# EAGLE board PCB control glider v30 (EAGLE 9.7.0)
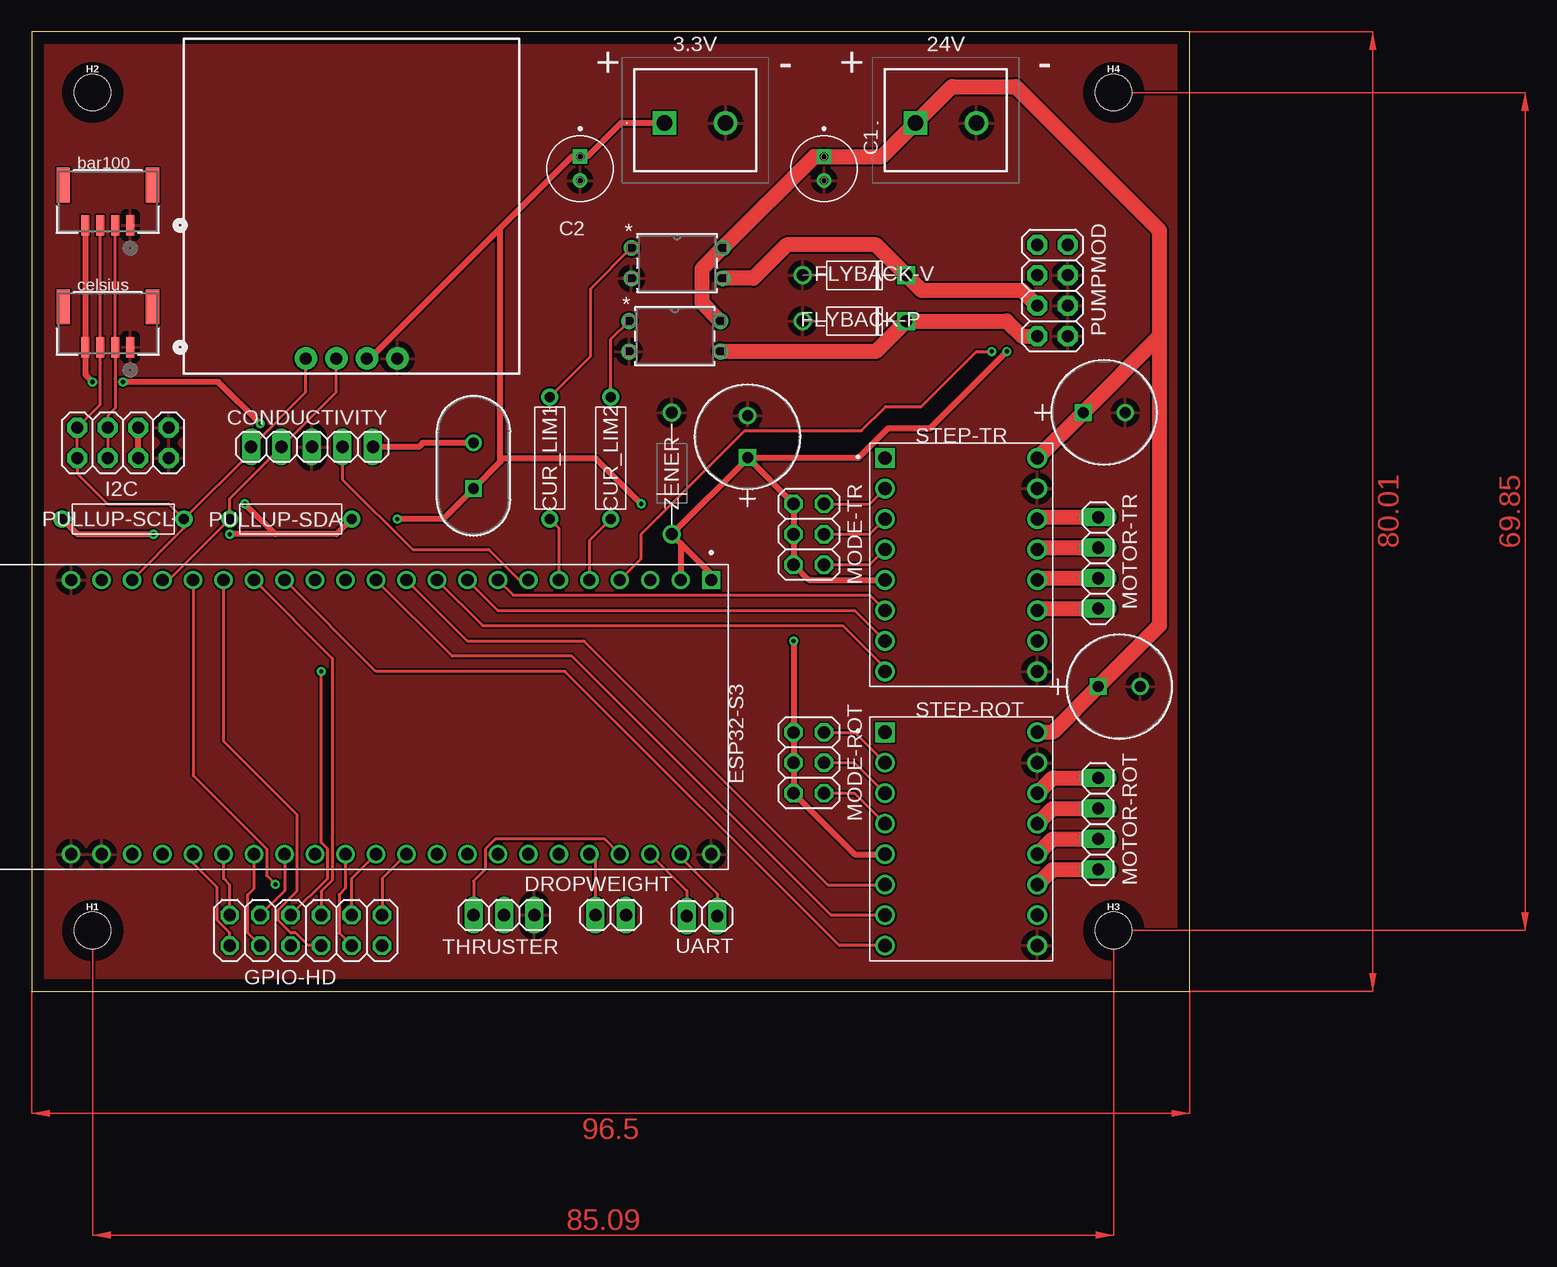
[diagram p0: board, top side]
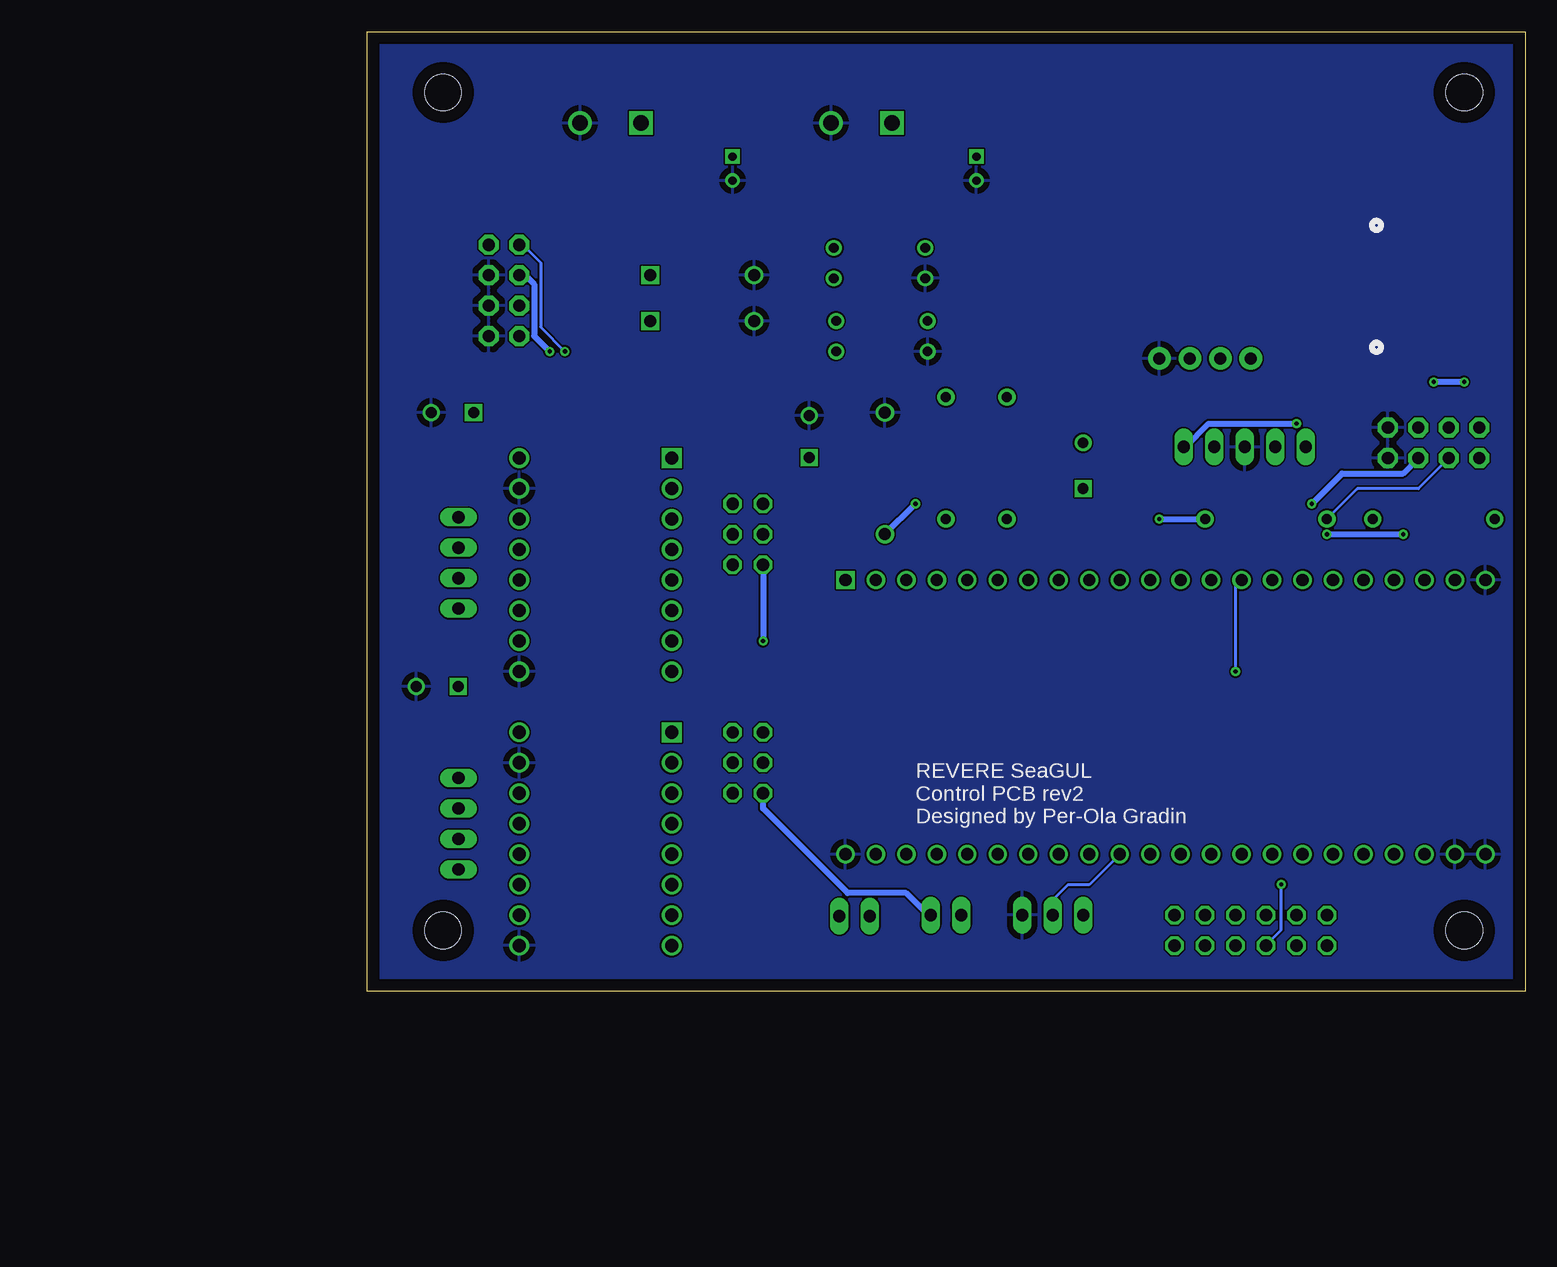
[diagram p1: board, bottom side, seen from below]

Size 96.5 x 80.01 mm. Coordinates in mm from the lower left corner, seen from the top.
Outline: 0,0 96.5,0 96.5,80.01 0,80.01 0,0
Copper layers (1*16): Top 0.035mm / dielectric 1.5mm / Bottom 0.035mm
Design rules "default *": minimum track width 6mil, minimum drill 0.35mm, track to track 6mil, track to pad 6mil, pad to pad 6mil, via to via 6mil, smd to smd 6mil, copper to edge 40mil, drill to drill 6mil, minimum pad ring 10mil, minimum via ring 8mil, stop-mask expansion 4mil, vias tented up to drill 0mil, thermal gap 0.5mm

## Footprints (pad centres in the part's own frame; a part is rotated, then mirrored left to right if it is on the bottom)
CTBP05082 = drill 1.3 pad 1.95 square: 1 0,0 | drill 1.3 pad 1.95: 2 5.08,0
CAP_RADIAL_2MM = drill 0.7 pad 1.1 square: 1 -1,0 | drill 0.7 pad 1.1: 2 1,0
CAP_PAN_8X11.5_PAN = drill 0.914 pad 1.422 square: 1 0,0 | drill 0.914 pad 1.422: 2 3.505,0
CONN_BM04B-GHS-TBT_JST = smd 0.66 x 1.702: 1 -1.875,1.976; 2 -0.625,1.976; 3 0.625,1.976; 4 1.875,1.976 | smd 1.092 x 2.896: 5 -3.725,-1.373; 6 3.725,-1.373
1X05 = drill 1.016 long: 1 -5.08,0; 2 -2.54,0; 3 0,0; 4 2.54,0; 5 5.08,0
RESAD1016W63L850D250B = drill 0.83 pad 1.43: 1 -5.08,0; 2 5.08,0
1X02 = drill 1.016 long: 1 -1.27,0; 2 1.27,0
XCVR_ESP32-S3-DEVKITC-1U-N8R2 = drill 1.02 square: J1_1 -11.43,29.97 | drill 1.02: J1_2 -11.43,27.43; J1_3 -11.43,24.89; J1_4 -11.43,22.35; J1_5 -11.43,19.81; J1_6 -11.43,17.27; J1_7 -11.43,14.73; J1_8 -11.43,12.19; J1_9 -11.43,9.65; J1_10 -11.43,7.11; J1_11 -11.43,4.57; J1_12 -11.43,2.03; J1_13 -11.43,-0.51; J1_14 -11.43,-3.05; J1_15 -11.43,-5.59; J1_16 -11.43,-8.13; J1_17 -11.43,-10.67; J1_18 -11.43,-13.21; J1_19 -11.43,-15.75; J1_20 -11.43,-18.29; J1_21 -11.43,-20.83; J1_22 -11.43,-23.37; J3_1 11.43,29.97; J3_2 11.43,27.43; J3_3 11.43,24.89; J3_4 11.43,22.35; J3_5 11.43,19.81; J3_6 11.43,17.27; J3_7 11.43,14.73; J3_8 11.43,12.19; J3_9 11.43,9.65; J3_10 11.43,7.11; J3_11 11.43,4.57; J3_12 11.43,2.03; J3_13 11.43,-0.51; J3_14 11.43,-3.05; J3_15 11.43,-5.59; J3_16 11.43,-8.13; J3_17 11.43,-10.67; J3_18 11.43,-13.21; J3_19 11.43,-15.75; J3_20 11.43,-18.29; J3_21 11.43,-20.83; J3_22 11.43,-23.37
DO-41 = drill 1: A 4.325,0 | drill 1 square: C -4.325,0
FUS_LVR033_TYCO_TYC = drill 0.889 pad 1.397 square: 1 0,0 | drill 0.889 pad 1.397: 2 3.81,0
2X06 = drill 1.016 octagon: 1 -6.35,-1.27; 2 -6.35,1.27; 3 -3.81,-1.27; 4 -3.81,1.27; 5 -1.27,-1.27; 6 -1.27,1.27; 7 1.27,-1.27; 8 1.27,1.27; 9 3.81,-1.27; 10 3.81,1.27; 11 6.35,-1.27; 12 6.35,1.27
STAND-OFF-TIGHT = hole 3.048: 0,0
2X04 = drill 1.016 pad 1.676 octagon: 1 -3.81,-1.27; 2 -3.81,1.27; 3 -1.27,-1.27; 4 -1.27,1.27; 5 1.27,-1.27; 6 1.27,1.27; 7 3.81,-1.27; 8 3.81,1.27
2X03 = drill 1.016 octagon: 1 -2.54,-1.27; 2 -2.54,1.27; 3 0,-1.27; 4 0,1.27; 5 2.54,-1.27; 6 2.54,1.27
1X04 = drill 1.016 long: 1 -3.81,0; 2 -1.27,0; 3 1.27,0; 4 3.81,0
OPENLOG = drill 1.016 pad 1.88: GND 17.78,1.27; RXI 10.16,1.27; TXO 12.7,1.27; VCC 15.24,1.27
A-DIP4_THD_OMR = drill 0.813 pad 1.321: 1 0,0; 2 0,-2.54; 3 7.62,-2.54; 4 7.62,0
IC_DRV8825_STEPPER_MOTOR_DRIVER_CARRIER = drill 1.1 square: 1 -6.35,8.89 | drill 1.1: 2 -6.35,6.35; 3 -6.35,3.81; 4 -6.35,1.27; 5 -6.35,-1.27; 6 -6.35,-3.81; 7 -6.35,-6.35; 8 -6.35,-8.89; 9 6.35,-8.89; 10 6.35,-6.35; 11 6.35,-3.81; 12 6.35,-1.27; 13 6.35,1.27; 14 6.35,3.81; 15 6.35,6.35; 16 6.35,8.89
1X03 = drill 1.016 long: 1 -2.54,0; 2 0,0; 3 2.54,0
DIODE-AXIAL = drill 1: 1 -5.08,0; 2 5.08,0

## Placement (x,y rotation side)
3.3V  CTBP0508_2  [CTBP05082]  52.75,72.39 0 top
24V  CTBP0508_2  [CTBP05082]  73.66,72.39 0 top
C1  ECA-1HM100  [CAP_RADIAL_2MM]  66.04,68.58 270 top
C2  ECA-1HM100  [CAP_RADIAL_2MM]  45.72,68.58 270 top
CAP-ESP  EEUHD1H101BCAP_PAN_8X11.5_PAN  [CAP_PAN_8X11.5_PAN]  59.66,44.48 90 top
CAP-ROT  EEUHD1H101BCAP_PAN_8X11.5_PAN  [CAP_PAN_8X11.5_PAN]  88.9,25.4 0 top
CAP-TR  EEUHD1H101BCAP_PAN_8X11.5_PAN  [CAP_PAN_8X11.5_PAN]  87.63,48.26 0 top
CELSIUS  BM04B-GHS-TBTCONN_BM04B-GHS-TBT_JST  [CONN_BM04B-GHS-TBT_JST]  6.35,55.67 180 top
CONDUCTIVITY  PINHD-1X5  [1X05]  23.37,45.39 0 top
CUR_LIM1  [RESAD1016W63L850D250B]  43.18,44.45 270 top
CUR_LIM2  [RESAD1016W63L850D250B]  48.26,44.45 270 top
DROPWEIGHT  [1X02]  48.26,6.35 180 top
ESP32-S3  ESP32-S3-DEVKITC-1U-N8R2  [XCVR_ESP32-S3-DEVKITC-1U-N8R2]  26.67,22.86 270 top
FLYBACK-P  1N4004  [DO-41]  68.58,55.88 180 top
FLYBACK-V  1N4004  [DO-41]  68.58,59.69 180 top
FUSE-SENS  LVR033KFUS_LVR033_TYCO_TYC  [FUS_LVR033_TYCO_TYC]  36.83,41.91 90 top
GPIO-HD  PINHD-2X6  [2X06]  22.86,5.08 0 top
H1  STAND-OFFTIGHT  [STAND-OFF-TIGHT]  5.08,5.08 0 top
H2  STAND-OFFTIGHT  [STAND-OFF-TIGHT]  5.08,74.93 0 top
H3  STAND-OFFTIGHT  [STAND-OFF-TIGHT]  90.17,5.08 0 top
H4  STAND-OFFTIGHT  [STAND-OFF-TIGHT]  90.17,74.93 0 top
I2C  [2X04]  7.62,45.72 180 top
MODE-ROT  PINHD-2X3  [2X03]  64.77,19.05 270 top
MODE-TR  PINHD-2X3  [2X03]  64.77,38.1 270 top
MOTOR-ROT  PINHD-1X4  [1X04]  88.88,13.97 90 top
MOTOR-TR  PINHD-1X4  [1X04]  88.88,35.71 90 top
PRESSURE  BM04B-GHS-TBTCONN_BM04B-GHS-TBT_JST  [CONN_BM04B-GHS-TBT_JST]  6.35,65.83 180 top
PULLUP-SCL  [RESAD1016W63L850D250B]  7.62,39.37 180 top
PULLUP-SDA  [RESAD1016W63L850D250B]  21.59,39.37 0 top
PUMPMOD  [2X04]  85.09,58.42 90 top
QWIIC-OPENLOG  OPENLOG  [OPENLOG]  12.7,51.49 0 top
SSR-PUMP  G3VM-61ARA-DIP4_THD_OMR  [A-DIP4_THD_OMR]  49.79,55.88 0 top
SSR-VALVE  G3VM-61ARA-DIP4_THD_OMR  [A-DIP4_THD_OMR]  49.99,61.97 0 top
STEP-ROT  DRV8825_STEPPER_MOTOR_DRIVER_CARRIER  [IC_DRV8825_STEPPER_MOTOR_DRIVER_CARRIER]  77.47,12.7 0 top
STEP-TR  DRV8825_STEPPER_MOTOR_DRIVER_CARRIER  [IC_DRV8825_STEPPER_MOTOR_DRIVER_CARRIER]  77.47,35.56 0 top
THRUSTER  [1X03]  39.37,6.35 0 top
UART  [1X02]  55.88,6.27 180 top
ZENER  ZENER_DIODE-AXIAL  [DIODE-AXIAL]  53.34,43.18 270 top

## Library data of the parts
3.3V 24V = CTBP0508_2; DESCRIPTION: Conn Terminal Block F 2 POS 5.08mm Solder ST Thru-Hole 8A; HEIGHT: 10.2mm; MANUFACTURER_NAME: CAMDENBOSS; MANUFACTURER_PART_NUMBER: CTBP0508/2
C1 C2 = Resistor_Capacitor; CREATED_BY: PCBLayout.com; DIGIKEY_PART_NUMBER: P5178-ND; MANUFACTURER: Panasonic Electronic Components; MPN: ECA-1HM100; PACKAGE: CAP RADIAL 2MM LS
CAP-ESP CAP-ROT CAP-TR = 100uf-50V-electrolytic_Library; COPYRIGHT: Copyright (C) 2024 Ultra Librarian. All rights reserved.; MANUFACTURER_PART_NUMBER: EEUHD1H101B; MFR_NAME: Panasonic
CELSIUS PRESSURE = BM04B_GHS_TBT_Library; COPYRIGHT: Copyright (C) 2024 Ultra Librarian. All rights reserved.; MANUFACTURER_PART_NUMBER: BM04B-GHS-TBT; MFR_NAME: JST
CONDUCTIVITY = Connector; CATEGORY: Headers; DESCRIPTION: Header, Straight, 5 Position; MANUFACTURER: Generic; MPN: Generic; OPERATING_TEMPERATURE: Generic; PART_STATUS: Active; PITCH: 0.100" (2.54mm); ROHS_COMPLIANCE: Generic; SERIES: Generic; SUB-CATEGORY: Headers, Male Pins; TYPE: Board to Board or Cable, Unshrouded, Through Hole, Straight
CUR_LIM1 CUR_LIM2 PULLUP-SCL PULLUP-SDA ZENER = Tinkercad
DROPWEIGHT UART = Airquality_Sensor
ESP32-S3 = ESP32-S3-DEVKITC-1U-N8R2; AVAILABILITY: In Stock; CHECK_PRICES: https://www.snapeda.com/parts/ESP32-S3-DEVKITC-1U-N8R2/Espressif+Systems/view-part/?ref=eda; DESCRIPTION: WiFi Development Tools - 802.11 ESP32-S3 Gen-Purpose Dev Bd, embeds ESP32-S3-WROOM-1U-N8R2, 8 MB Quad Flash, 2 MB Quad PSRAM, IPEX antenna connector, w/ Pin Header; MF: Espressif Systems; MP: ESP32-S3-DEVKITC-1U-N8R2; PACKAGE: None; PRICE: None; PURCHASE-URL: https://www.snapeda.com/api/url_track_click_mouser/?unipart_id=12089198&manufacturer=Espressif Systems&part_name=ESP32-S3-DEVKITC-1U-N8R2&search_term=esp32-s3-devkitc; SNAPEDA_LINK: https://www.snapeda.com/parts/ESP32-S3-DEVKITC-1U-N8R2/Espressif+Systems/view-part/?ref=snap
FLYBACK-P FLYBACK-V = Diodes; CREATED_BY: PCBLayout.com; DIGIKEY_PART_NUMBER: 1N4004MSCT-ND; MANUFACTURER: Micro Commercial Co; MPN: 1N4004; PACKAGE: DO-41
FUSE-SENS = LVR033K-fuse_Library; COPYRIGHT: Copyright (C) 2024 Ultra Librarian. All rights reserved.; MANUFACTURER_PART_NUMBER: LVR033K; MFR_NAME: TE Connectivity
GPIO-HD = Connector; CATEGORY: Headers; DESCRIPTION: Header, Straight, 2x6 Position; MANUFACTURER: Generic; MPN: Generic; OPERATING_TEMPERATURE: Generic; PART_STATUS: Active; PITCH: 0.100" (2.54mm); ROHS_COMPLIANCE: Generic; SERIES: Generic; SUB-CATEGORY: Headers, Male Pins; TYPE: Board to Board or Cable, Unshrouded, Through Hole, Straight
H1-H4 = SparkFun-Hardware
I2C PUMPMOD = adafruit
MODE-ROT MODE-TR = Connector; CATEGORY: Headers; DESCRIPTION: Header, Straight, 2x3 Position; MANUFACTURER: Generic; MPN: Generic; OPERATING_TEMPERATURE: Generic; PART_STATUS: Active; PITCH: 0.100" (2.54mm); ROHS_COMPLIANCE: Generic; SERIES: Generic; SUB-CATEGORY: Headers, Male Pins; TYPE: Board to Board or Cable, Unshrouded, Through Hole, Straight
MOTOR-ROT MOTOR-TR = Connector; CATEGORY: Headers; DESCRIPTION: Header, Straight, 4 Position; MANUFACTURER: Generic; MPN: Generic; OPERATING_TEMPERATURE: Generic; PART_STATUS: Active; PITCH: 0.100" (2.54mm); ROHS_COMPLIANCE: Generic; SERIES: Generic; SUB-CATEGORY: Headers, Male Pins; TYPE: Board to Board or Cable, Unshrouded, Through Hole, Straight
QWIIC-OPENLOG = OpenLog qwiic
SSR-PUMP SSR-VALVE = g3vm-61ar; COPYRIGHT: Copyright (C) 2024 Ultra Librarian. All rights reserved.; MANUFACTURER_PART_NUMBER: G3VM-61AR; MFR_NAME: Omron
STEP-ROT STEP-TR = DRV8825_STEPPER_MOTOR_DRIVER_CARRIER; AVAILABILITY: Not in stock; CHECK_PRICES: https://www.snapeda.com/parts/DRV8825%20STEPPER%20MOTOR%20DRIVER%20CARRIER/Pololu/view-part/?ref=eda; DESCRIPTION: Stepper, Bipolar 8.2 ~ 45VDC Supply 1.5A 8.2 ~ 45V Load; MF: Pololu; MP: DRV8825 STEPPER MOTOR DRIVER CARRIER; PACKAGE: None; PRICE: None; SNAPEDA_LINK: https://www.snapeda.com/parts/DRV8825%20STEPPER%20MOTOR%20DRIVER%20CARRIER/Pololu/view-part/?ref=snap
THRUSTER = pinhead

## Nets
3.3V: 3.3V.1 C2.1 CAP-ESP.1 DROPWEIGHT.1 ESP32-S3.J1_1 ESP32-S3.J1_2 FUSE-SENS.1 I2C.3 I2C.4 MODE-ROT.1 MODE-ROT.3 MODE-ROT.5 MODE-TR.1 MODE-TR.3 MODE-TR.5 PULLUP-SCL.2 PULLUP-SDA.2 PUMPMOD.6 QWIIC-OPENLOG.VCC STEP-ROT.5 STEP-TR.5 ZENER.2
5V0: ESP32-S3.J1_21
+24V: 24V.1 C1.1 CAP-ROT.1 CAP-TR.1 SSR-PUMP.4 SSR-VALVE.4 STEP-ROT.16 STEP-TR.16
ATLAS-ONOFF: CONDUCTIVITY.4 ESP32-S3.J1_7
DROPWEIGHT-SIGNAL: DROPWEIGHT.2 ESP32-S3.J3_5
ESC-SIGNAL: ESP32-S3.J3_4 THRUSTER.1
GND [New Class]: 3.3V.2 24V.2 C1.2 C2.2 CAP-ESP.2 CAP-ROT.2 CAP-TR.2 CELSIUS.1 CONDUCTIVITY.3 ESP32-S3.J1_22 ESP32-S3.J3_1 ESP32-S3.J3_21 ESP32-S3.J3_22 FLYBACK-P.A FLYBACK-V.A I2C.1 I2C.2 PRESSURE.1 PUMPMOD.1 PUMPMOD.3 PUMPMOD.5 QWIIC-OPENLOG.GND SSR-PUMP.2 SSR-VALVE.2 STEP-ROT.9 STEP-ROT.15 STEP-TR.9 STEP-TR.15 THRUSTER.3 ZENER.1
GPIO10: ESP32-S3.J1_16 GPIO-HD.8
GPIO11: ESP32-S3.J1_17 GPIO-HD.7
GPIO12: ESP32-S3.J1_18 GPIO-HD.5
GPIO21: ESP32-S3.J3_18 GPIO-HD.1
GPIO35: ESP32-S3.J3_13 GPIO-HD.9
GPIO36: ESP32-S3.J3_12 GPIO-HD.10
GPIO37: ESP32-S3.J3_11 GPIO-HD.12
GPIO45: ESP32-S3.J3_15 GPIO-HD.4
GPIO46: ESP32-S3.J1_14 GPIO-HD.6
GPIO47: ESP32-S3.J3_17 GPIO-HD.2
GPIO48: ESP32-S3.J3_16 GPIO-HD.3
N$1: ESP32-S3.J3_2 UART.1
N$3: ESP32-S3.J3_3 UART.2
N$4: MODE-TR.2 STEP-TR.2
N$5: MODE-TR.4 STEP-TR.3
N$6: MODE-TR.6 STEP-TR.4
N$7: CELSIUS.4 CONDUCTIVITY.5 FUSE-SENS.2 PRESSURE.4
N$8: MODE-ROT.2 STEP-ROT.2
N$10: MODE-ROT.6 STEP-ROT.4
N$12: MODE-ROT.4 STEP-ROT.3
N$13: CUR_LIM2.1 SSR-PUMP.1
N$14: CUR_LIM1.1 SSR-VALVE.1
POTENTIOMETER-SIG: ESP32-S3.J1_4 PUMPMOD.8
PUMP-VIN: FLYBACK-P.C PUMPMOD.2 SSR-PUMP.3
R-A1: MOTOR-ROT.2 STEP-ROT.12
R-A2: MOTOR-ROT.1 STEP-ROT.11
R-B1: MOTOR-ROT.3 STEP-ROT.13
R-B2: MOTOR-ROT.4 STEP-ROT.14
ROT-DIR: ESP32-S3.J1_15 STEP-ROT.8
ROT-STEP: ESP32-S3.J1_12 STEP-ROT.7
RST: ESP32-S3.J1_3
SCL: CELSIUS.3 CONDUCTIVITY.1 ESP32-S3.J1_20 I2C.7 I2C.8 PRESSURE.3 PULLUP-SCL.1 QWIIC-OPENLOG.RXI
SDA: CELSIUS.2 CONDUCTIVITY.2 ESP32-S3.J1_19 I2C.5 I2C.6 PRESSURE.2 PULLUP-SDA.1 QWIIC-OPENLOG.TXO
SSR-PUMP-SIG: CUR_LIM2.2 ESP32-S3.J1_5
SSR-THRUSTER: ESP32-S3.J3_10 THRUSTER.2
SSR-VALVE-SIG: CUR_LIM1.2 ESP32-S3.J1_6
STEP-ROT-SLP: ESP32-S3.J1_11 STEP-ROT.6
STEP-TR-SLP: ESP32-S3.J1_8 STEP-TR.6
T-A1: MOTOR-TR.2 STEP-TR.12
T-A2: MOTOR-TR.1 STEP-TR.11
T-B1: MOTOR-TR.3 STEP-TR.13
T-B2: MOTOR-TR.4 STEP-TR.14
TR-DIR: ESP32-S3.J1_10 STEP-TR.8
TR-STEP: ESP32-S3.J1_9 STEP-TR.7
VALVE-VIN: FLYBACK-V.C PUMPMOD.4 SSR-VALVE.3

## Tracks (layer width: path | path; a pad name or v marks a point on that pad's centre or on a via)
3.3V  (via drill 0.35)
  Top 0.508: 39.08,63.63 28.2,52.76 QWIIC-OPENLOG.VCC | 39.08,44.45 39.08,44.16 FUSE-SENS.1 34.29,39.37 v30.48,39.37 | 39.08,44.45 39.08,63.63 | 39.08,44.45 46.99,44.45 v50.8,40.64 | CAP-ESP.1 59.66,44.42 ZENER.2 54.1,37.34 | 54.1,37.34 ESP32-S3.J1_2 | CAP-ESP.1 68.92,44.48 71.4,46.95 74.89,46.95 v81.28,53.34 | PULLUP-SDA.2 25.4,38.1 20.32,38.1 | 20.32,38.1 v16.51,38.1 | v10.16,38.1 3.81,38.1 PULLUP-SCL.2 | 20.32,38.1 v17.78,40.64 | I2C.4 I2C.3 | CAP-ESP.1 MODE-TR.1 MODE-TR.3 MODE-TR.5 64.77,34.29 STEP-TR.5 | v63.5,29.21 MODE-ROT.1 MODE-ROT.3 MODE-ROT.5 68.58,11.43 STEP-ROT.5 | 39.08,63.63 45.02,69.58 C2.1 46.29,69.58 49.1,72.39 3.3V.1 | 54.1,37.34 56.64,34.8 ESP32-S3.J1_1
  Bottom 0.508: v50.8,40.64 ZENER.2 | v30.48,39.37 PULLUP-SDA.2 | v16.51,38.1 v10.16,38.1 | v17.78,40.64 15.24,43.18 10.16,43.18 I2C.4 | v81.28,53.34 82.58,54.63 82.58,58.94 83.33,59.69 PUMPMOD.6 | MODE-TR.5 v63.5,29.21 | DROPWEIGHT.1 49.74,6.35 51.59,8.2 56.46,8.2 63.5,15.24 MODE-ROT.5
+24V
  Top 1.27: SSR-PUMP.4 55.88,57.41 55.88,60.24 SSR-VALVE.4 65.22,69.58 C1.1 70.85,69.58 24V.1 76.69,75.42 82.01,75.42 93.98,63.45 93.98,54.61 | 93.98,54.61 93.98,30.48 CAP-ROT.1 85.09,21.59 STEP-ROT.16 | STEP-TR.16 CAP-TR.1 93.98,54.61
ATLAS-ONOFF
  Top 0.254: CONDUCTIVITY.4 25.91,42.67 31.75,36.83 38.1,36.83 40.64,34.29 ESP32-S3.J1_7
DROPWEIGHT-SIGNAL
  Top 0.254: ESP32-S3.J3_5 46.99,10.92 DROPWEIGHT.2
ESC-SIGNAL
  Top 0.254: ESP32-S3.J3_4 47.75,12.7 38.65,12.7 37.82,11.86 37.82,10.18 36.83,9.19 THRUSTER.1
GND
  pour Top: 0.13,0.13 96.37,0.13 96.37,79.88 0.13,79.88
  pour Bottom: 0.13,0.13 96.37,0.13 96.37,79.88 0.13,79.88
GPIO10
  Top 0.254: ESP32-S3.J1_16 25.07,27.76 25.07,9.26 24.13,8.31 GPIO-HD.8
GPIO11
  Top 0.254: ESP32-S3.J1_17 16,20.83 22.12,14.71 22.12,8.36 20.55,6.78 20.55,5.92 21.62,4.85 22.02,4.85 23.06,3.81 GPIO-HD.7
GPIO12  (via drill 0.35)
  Top 0.254: ESP32-S3.J1_18 13.46,17.99 19.58,11.86 19.58,9.65 v20.32,8.92
  Bottom 0.254: GPIO-HD.5 20.32,5.11 v20.32,8.92
GPIO21
  Top 0.254: ESP32-S3.J3_18 13.46,10.67 15.47,8.66 15.47,5.92 16.51,4.88 GPIO-HD.1
GPIO35
  Top 0.254: ESP32-S3.J3_13 26.16,8.58 25.63,8.05 25.63,4.85 GPIO-HD.9
GPIO36
  Top 0.254: ESP32-S3.J3_12 26.67,9.4 GPIO-HD.10
GPIO37
  Top 0.254: ESP32-S3.J3_11 29.21,9.4 GPIO-HD.12
GPIO45
  Top 0.254: ESP32-S3.J3_15 21.08,8.38 GPIO-HD.4
GPIO46  (via drill 0.35)
  Top 0.254: v24.13,26.67 24.13,12.4 24.66,11.86 24.66,9.42 GPIO-HD.6
  Bottom 0.254: v24.13,26.67 24.13,33.78 ESP32-S3.J1_14
GPIO47
  Top 0.254: ESP32-S3.J3_17 16,9.4 16.51,8.89 GPIO-HD.2
GPIO48
  Top 0.254: ESP32-S3.J3_16 18.54,8.58 18.01,8.05 18.01,4.85 GPIO-HD.3
N$1
  Top 0.254: ESP32-S3.J3_2 54.08,11.41 54.08,11.21 57.15,8.14 UART.1
N$3
  Top 0.254: UART.2 54.61,8.38 ESP32-S3.J3_3
N$4
  Top 0.254: MODE-TR.2 69.85,40.64 STEP-TR.2
N$5
  Top 0.254: MODE-TR.4 69.85,38.1 STEP-TR.3
N$6
  Top 0.254: MODE-TR.6 69.85,35.56 STEP-TR.4
N$7  (via drill 0.35)
  Top 0.508: FUSE-SENS.2 32.59,45.72 32.26,45.39 CONDUCTIVITY.5 | PRESSURE.4 CELSIUS.4 4.47,51.41 v5.08,50.8 | v7.62,50.8 15.57,50.8 v19.05,47.32
  Bottom 0.508: CONDUCTIVITY.5 28.32,45.39 26.39,47.32 v19.05,47.32 | v5.08,50.8 v7.62,50.8
N$8
  Top 0.254: MODE-ROT.2 68.58,21.59 STEP-ROT.2
N$10
  Top 0.254: MODE-ROT.6 68.58,16.51 STEP-ROT.4
N$12
  Top 0.254: MODE-ROT.4 68.58,19.05 STEP-ROT.3
N$13
  Top 0.254: CUR_LIM2.1 48.26,54.35 SSR-PUMP.1
N$14
  Top 0.254: CUR_LIM1.1 46.58,52.93 46.58,58.57 SSR-VALVE.1
POTENTIOMETER-SIG  (via drill 0.35)
  Top 0.254: ESP32-S3.J1_4 50.8,36.07 50.8,38.1 59.44,46.74 69.16,46.74 71.18,48.76 74.16,48.76 78.74,53.34 v80.01,53.34
  Bottom 0.254: v80.01,53.34 82.04,55.37 82.04,60.76 83.51,62.23 PUMPMOD.8
PUMP-VIN
  Top 1.27: SSR-PUMP.3 70.36,53.34 FLYBACK-P.C 81.28,55.88 82.55,54.61 PUMPMOD.2
R-A1
  Top 1.27: STEP-ROT.12 85.09,12.7 MOTOR-ROT.2
R-A2
  Top 1.27: STEP-ROT.11 85.09,10.16 MOTOR-ROT.1
R-B1
  Top 1.27: STEP-ROT.13 85.09,15.24 MOTOR-ROT.3
R-B2
  Top 1.27: STEP-ROT.14 85.09,17.78 MOTOR-ROT.4
ROT-DIR
  Top 0.254: ESP32-S3.J1_15 28.7,26.67 44.45,26.67 67.31,3.81 STEP-ROT.8
ROT-STEP
  Top 0.254: ESP32-S3.J1_12 35.05,27.94 45.02,27.94 66.61,6.35 STEP-ROT.7
SCL
  Top 0.254: ESP32-S3.J1_20 12.7,38.61 PULLUP-SCL.1 | PULLUP-SCL.1 18.29,44.96 CONDUCTIVITY.1 22.86,49.96 QWIIC-OPENLOG.RXI | PULLUP-SCL.1 11.43,40.64 6.35,40.64 3.81,43.18 I2C.8 I2C.7 5.74,48.92 5.74,52.34 5.72,52.35 CELSIUS.3 PRESSURE.3
SDA
  Top 0.254: ESP32-S3.J1_19 11.43,34.29 PULLUP-SDA.1 16.51,41.07 CONDUCTIVITY.2 25.4,49.96 QWIIC-OPENLOG.TXO | I2C.6 I2C.5 6.35,47.99 6.96,48.6 6.96,51.07 6.97,51.09 CELSIUS.2 PRESSURE.2
  Bottom 0.254: I2C.6 8.89,41.91 13.97,41.91 PULLUP-SDA.1
SSR-PUMP-SIG
  Top 0.254: ESP32-S3.J1_5 46.48,37.59 CUR_LIM2.2
SSR-THRUSTER
  Bottom 0.254: ESP32-S3.J3_10 36.32,8.89 38.1,8.89 39.37,7.62 THRUSTER.2
SSR-VALVE-SIG
  Top 0.254: ESP32-S3.J1_6 43.94,38.61 CUR_LIM1.2
STEP-ROT-SLP
  Top 0.254: ESP32-S3.J1_11 36.32,29.21 46.02,29.21 66.34,8.89 STEP-ROT.6
STEP-TR-SLP
  Top 0.254: ESP32-S3.J1_8 40.13,33.02 69.85,33.02 STEP-TR.6
T-A1
  Top 1.27: STEP-TR.12 83.97,34.44 MOTOR-TR.2
T-A2
  Top 1.27: STEP-TR.11 83.97,31.9 MOTOR-TR.1
T-B1
  Top 1.27: STEP-TR.13 83.97,36.98 MOTOR-TR.3
T-B2
  Top 1.27: STEP-TR.14 83.97,39.52 MOTOR-TR.4
TR-DIR
  Top 0.254: ESP32-S3.J1_10 37.59,30.48 67.61,30.48 70,28.09 70.38,27.71 71.12,26.98 STEP-TR.8
TR-STEP
  Top 0.254: ESP32-S3.J1_9 38.86,31.75 68.58,31.75 STEP-TR.7
VALVE-VIN
  Top 1.27: SSR-VALVE.3 60.15,59.43 62.95,62.23 70.36,62.23 FLYBACK-V.C 74.17,58.42 82.55,58.42 PUMPMOD.4
(copper drawn outside any net)
  shapes: Top area x4

## Text on the board
tNames: + | - | + | - | bar100 | celsius
bNames: REVERE SeaGUL / Control PCB rev2 / Designed by Per-Ola Gradin